# Altium PCB Snippet of H2E2-ARC.PcbDoc
Units mil, origin at the board's own origin, x right, y up, seen from the top; angles counter-clockwise.
Board outline not stored, 4 copper layers (Top Layer, Internal Plane 1, Mid-Layer 1, Bottom Layer), stack 18.2 mil thick; 13 components, 0 nets, 32 pads, 0 vias.
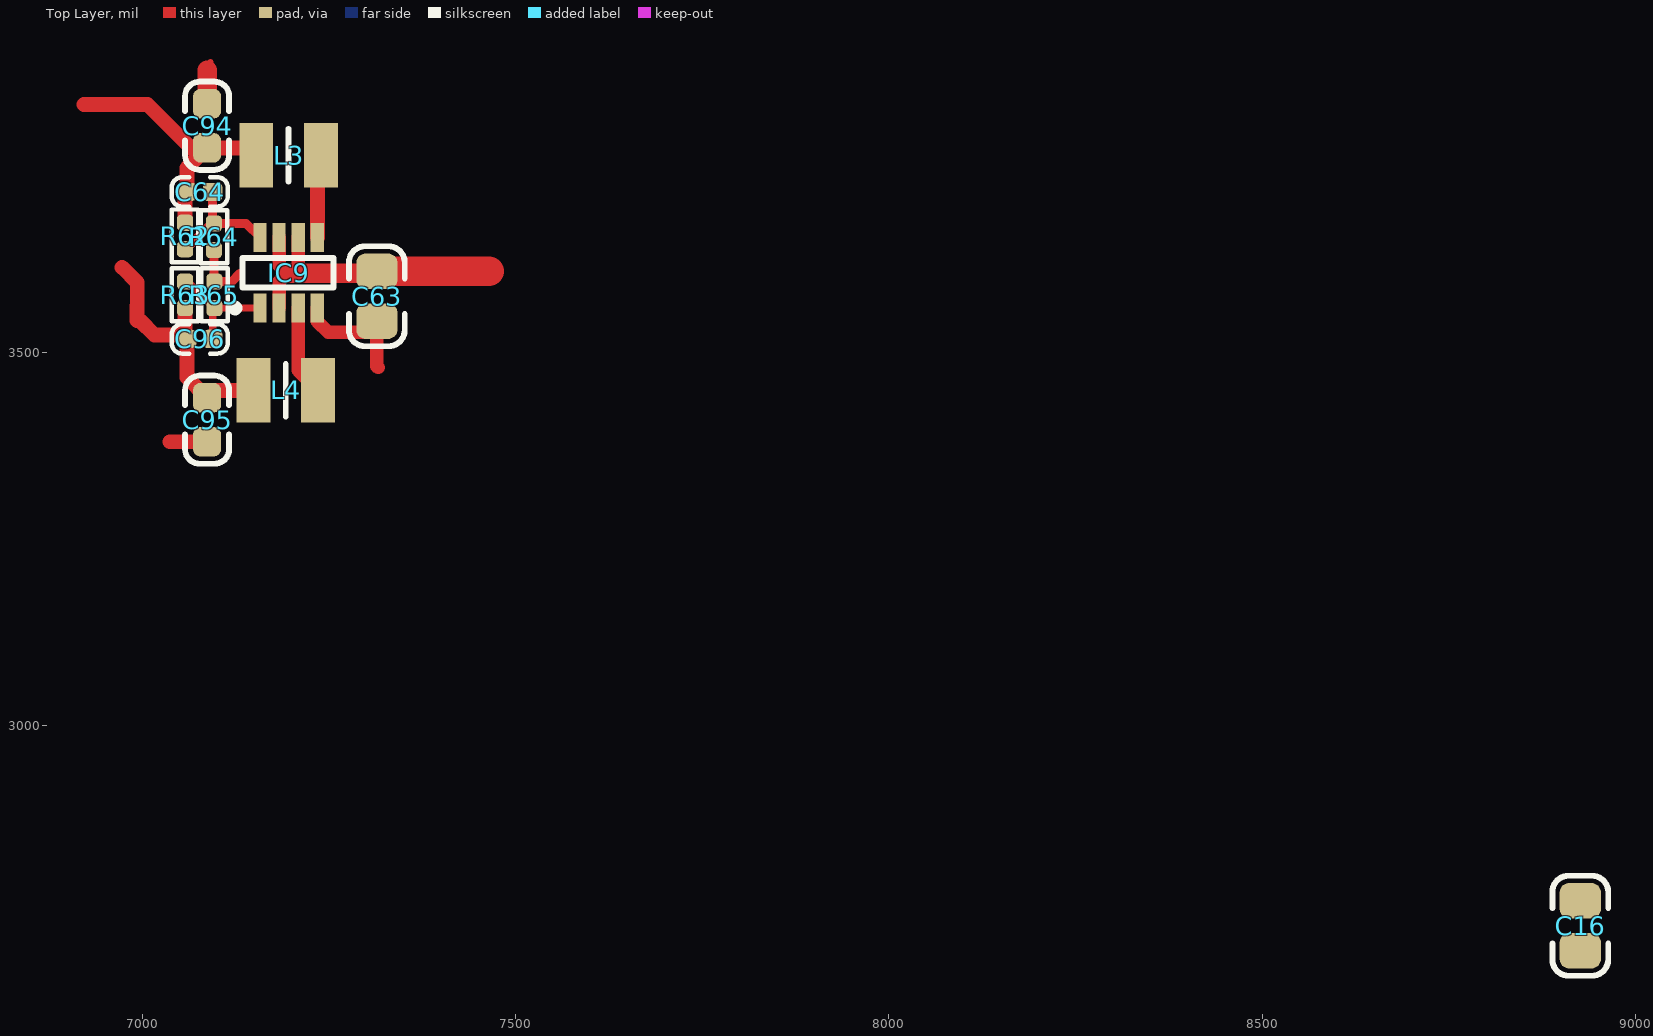
[diagram p0: Top Layer view]
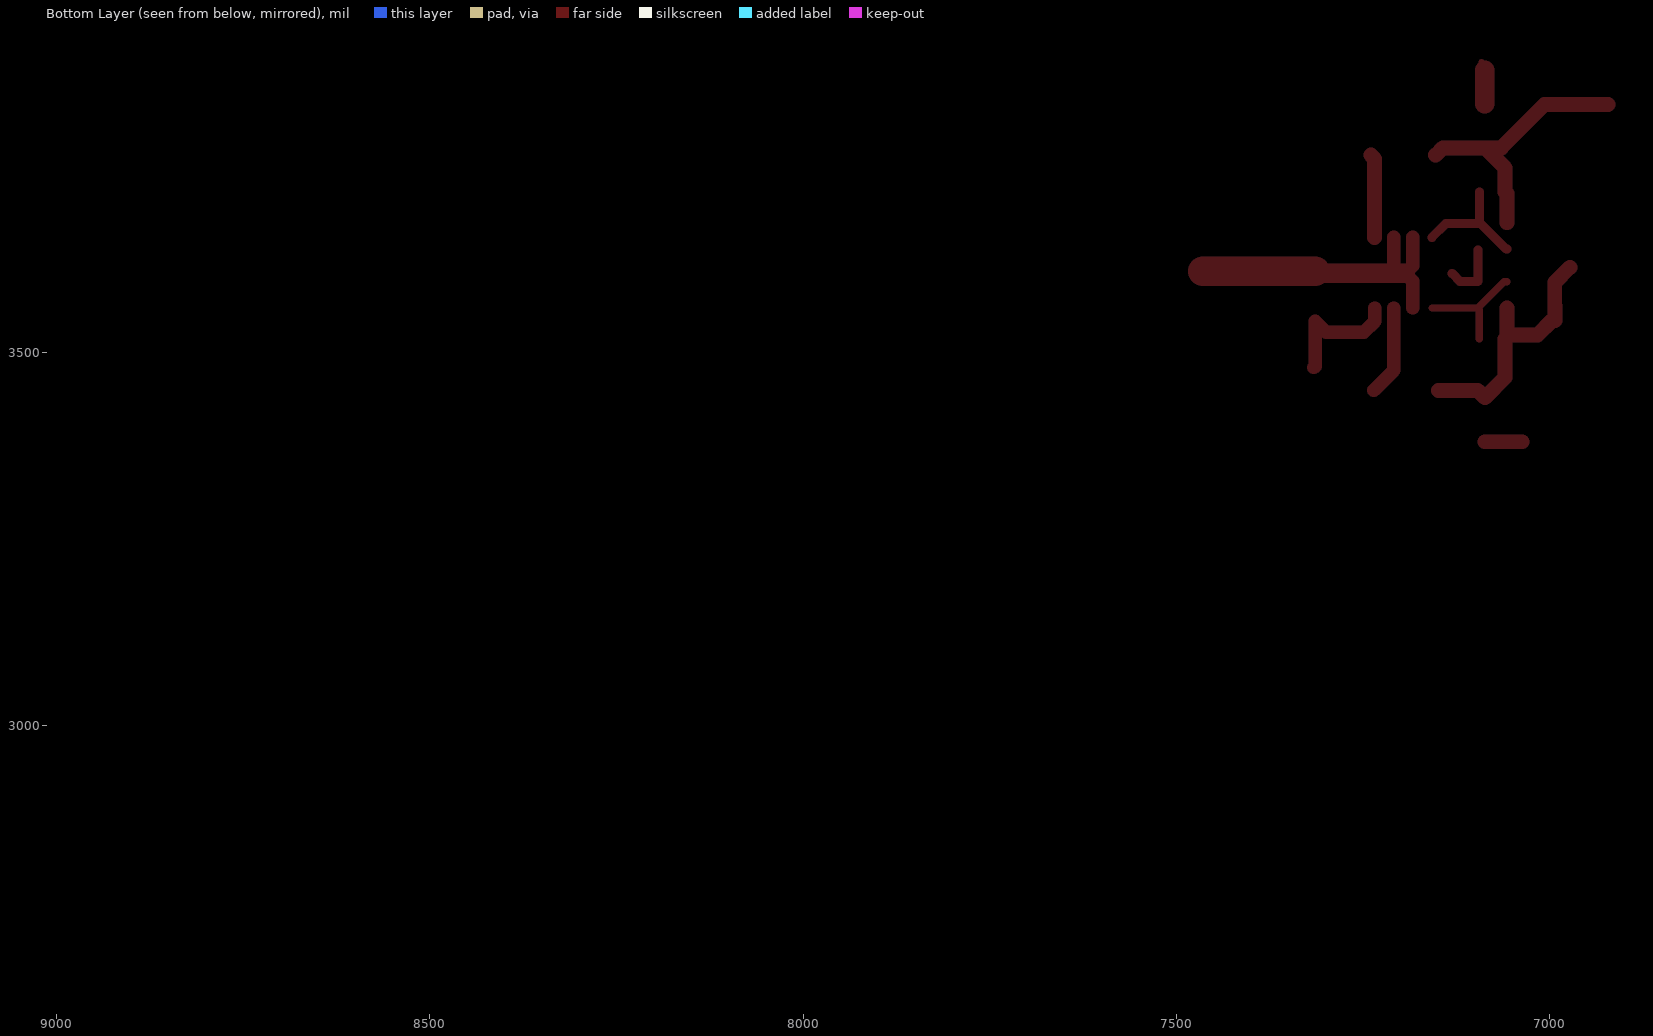
[diagram p1: Bottom Layer view, seen from below]
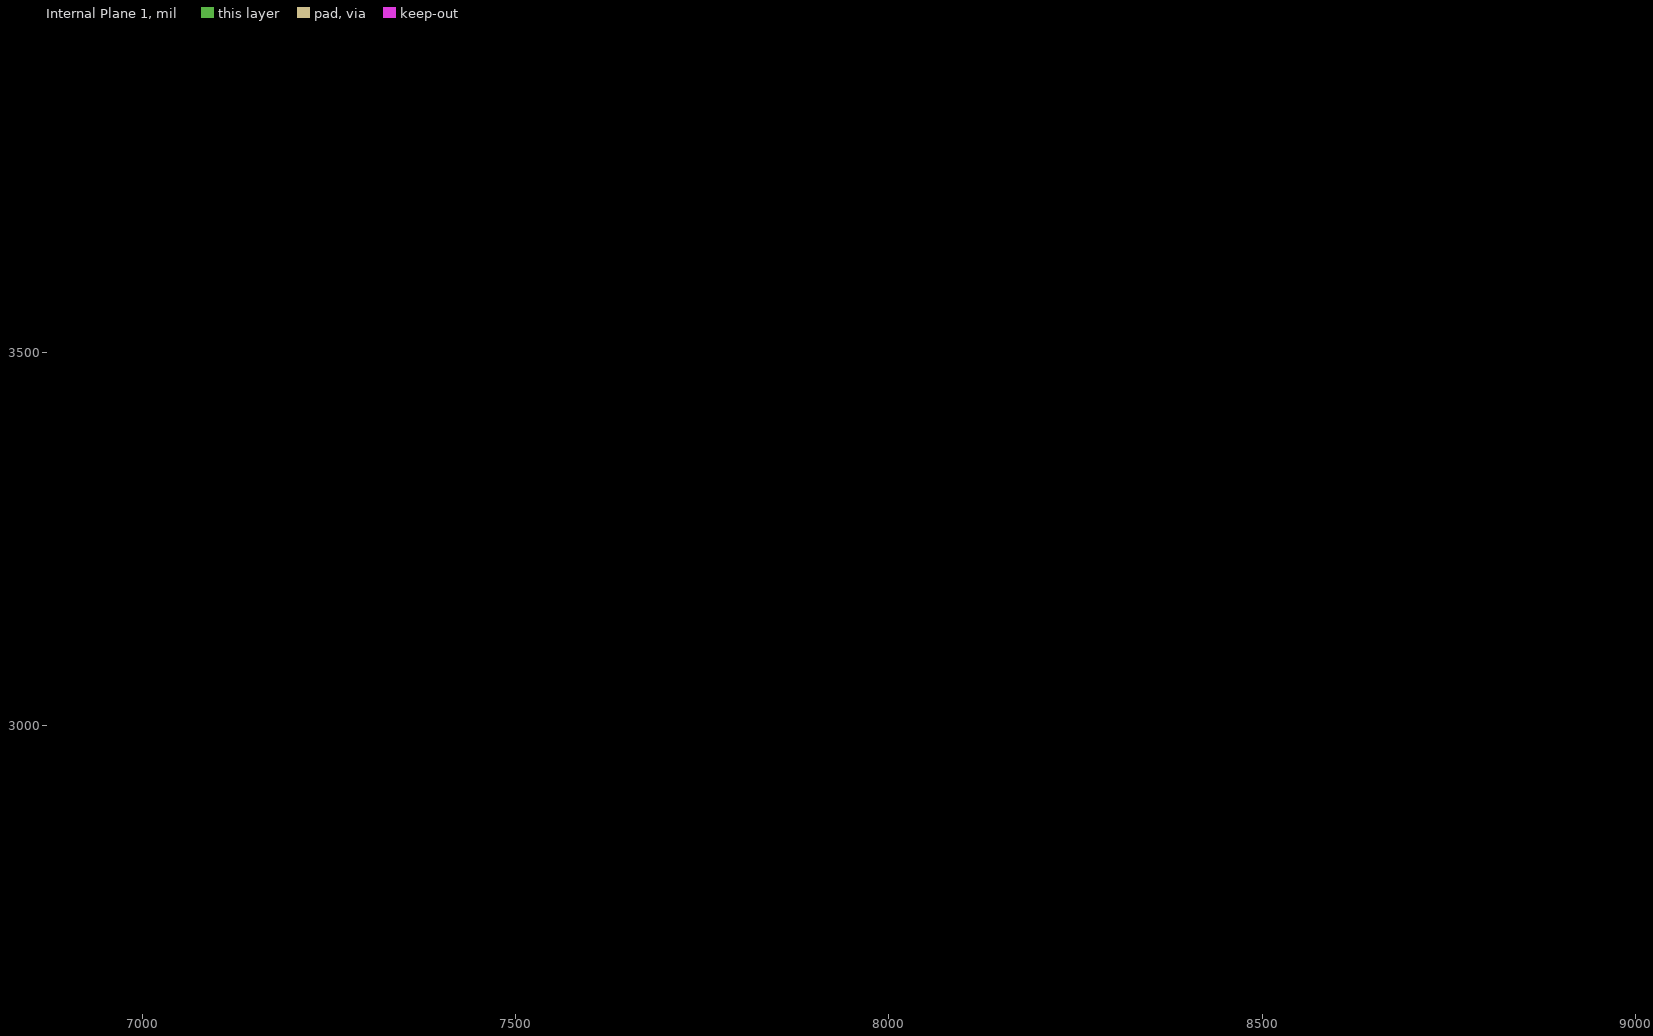
[diagram p2: Internal Plane 1, clearances drawn from the general rule]

## Layer stack, top to bottom
Top Solder: solder mask 0.4, Solder Resist, Dk 3.5
Top Layer: signal copper 1.4
Dielectric 1: dielectric 12.6, FR-4, Dk 4.8
Internal Plane 1: plane copper 1.4
Mid-Layer 1: signal copper 1.4
Bottom Layer: signal copper 1.4
Bottom Solder: solder mask 0.4, Solder Resist, Dk 3.5

## Components (designator, comment, footprint, x,y, rotation, side; value= is the part's Value field where it differs from the comment)
C16 "22uF" C_0805 8926.19,2731.83 r270 top
C63 "10uF" C_0805 7314.31,3574.97 r270 top
C64 "22pF" C_0402 7077.08,3714.73 r0 top
C94 "22uF" C_0603 7086.92,3803.31 r90 top
C95 "22uF" C_0603 7086.92,3409.61 r270 top
C96 "22pF" C_0402 7077.08,3517.88 r180 top
IC9 "SY8029AIC" SOT23-8 7196.2,3606.46 r90 top
L3 "2.2uH/1.5A" INDC2520X100N 7196.2,3763.94 r180 top
L4 "2.2uH/1.5A" INDC2520X100N 7192.26,3448.98 r0 top
R62 "22kΩ" R_0402 7057.39,3655.68 r90 top
R63 "100kΩ" R_0402 7057.39,3576.94 r90 top
R64 "22kΩ" R_0402 7096.07,3654.63 r90 top
R65 "22kΩ" R_0402 7096.76,3576.94 r90 top

## Footprints (in the part's own frame and the unit in brackets; to place one, negate y for a bottom-side part, rotate by r counter-clockwise, add the part's x,y. Pads: shape width x height; smd on the part's side, far side on the other; paste and mask are expansions set on the pad)
C_0402 [mm] "Chip Capacitor, 2-Leads, Body 1.00x0.50mm, IPC Medium Density"
  rrect50% 0.66x0.62 smd: 1(-0.44,0) 2(0.44,0)
  silkscreen extent -0.95,-0.5 0.95,0.5, body extent -0.52,-0.27 0.53,0.28, height 0.55
C_0603 [mm] "Chip Capacitor, 2-Leads, Body 1.60x0.80mm, IPC Medium Density"
  rrect50% 1x0.95 smd: 1(-0.75,0) 2(0.75,0)
  silkscreen extent -1.5,-0.75 1.5,0.75, body extent -0.8,-0.4 0.8,0.4, height 0.87
C_0805 [mm] "Chip Capacitor, 2-Leads, Body 2.00x1.25mm, IPC Medium Density"
  rrect50% 1.2x1.4 smd: 1(-0.85,0) 2(0.85,0)
  silkscreen extent -1.7,-0.95 1.7,0.95, body extent -1,-0.62 1,0.63, height 0.88
INDC2520X100N [mm]
  rect 1.15x2.2 smd: 1(-1.1,0) 2(1.1,0)
  silkscreen extent 0,-0.9 0,0.9, body extent -1.25,-1 1.25,1, height 1
R_0402 [mm] "Chip Resistor, 2-Leads, Body 1.00x0.50mm, IPC Medium Density"
  rrect50% 0.55x0.55 smd: 1(-0.45,0) 2(0.45,0)
  silkscreen extent -0.9,-0.45 0.9,0.45, body extent -0.5,-0.27 0.5,0.28, height 0.4
SOT23-8 [mm]
  rect 1x0.45 smd: 1(-1.2,0.975) 2(-1.2,0.325) 3(-1.2,-0.325) 4(-1.2,-0.975) 5(1.2,-0.975) 6(1.2,-0.325) 7(1.2,0.325) 8(1.2,0.975)
  silkscreen extent -1.32,-1.52 0.5,1.95, body extent -1.4,-1.51 1.4,1.49, height 1.15

## Part data
C16 C63 C64 C94 C95 C96: library part Cap_Chip, "贴片电容"
IC9: "DC-DC降压芯片", Manufacturer_Name="Silergy Corp", Manufacturer_Part_Number=SY8029AIC
L3 L4: library part MLP2520K1R0MT0S1, "Inductor", LCSC=C383383, Manufacturer_Name=TDK, Manufacturer_Part_Number=MLP2520K1R0MT0S1
R62 R63 R64 R65: library part Res_Chip, "贴片电阻"

## Nets (pads, with @x,y where several pads share a name; then routed paths per layer and width w, separated by ;. In a path a pad name is that pad's centre, name@x,y a point inside that pad or via, vN(x,y) a via of type N, cw(c..) or ccw(c..) an arc to the next point about the centre after c; other vN are vias at no path point)
pads on no net: C16.1 C16.2 C63.1 C63.2 C64.1 C64.2 C94.1 C94.2 C95.1 C95.2 C96.1 C96.2 IC9.1 IC9.2 IC9.3 IC9.4 IC9.5 IC9.6 IC9.7 IC9.8 L3.1 L3.2 L4.1 L4.2 R62.1 R62.2 R63.1 R63.2 R64.1 R64.2 R65.1 R65.2
copper on no net: | length 2067.7
  Top Layer w8: 7083.67,3881.1 7091.55,3888.98
  Top Layer w10: 7036.43,3381.1 7037.45,3380.08 ; 7057.39,3594.65 7061.33,3594.65 7096.76,3559.22 ; 7094.4,3517.88 7094.4,3556.86 7096.76,3559.22 ; 7157.81,3559.22 7096.76,3559.22
  Top Layer w12: 7057.39,3637.96 7058.35,3637.96 7094.4,3674.02 ; 7083.67,3881.1 7086.92,3877.86 ; 7094.4,3714.73 7094.4,3674.02 ; 7096.07,3636.91 7096.07,3595.34 7096.76,3594.65 7120.06,3594.65 7130.92,3605.51 ; 7157.81,3653.71 7139.18,3672.34 7096.07,3672.34 7094.4,3674.02
  Top Layer w18: 7183.4,3559.22 7183.4,3595 7193.91,3605.51 7183.4,3616.02 7183.4,3653.71 ; 7208.99,3559.22 7208.99,3475.56 7235.57,3448.98 ; 7208.99,3606.18 7208.99,3653.71 ; 7234.58,3559.22 7234.58,3541.22 7249.03,3526.77 7299.58,3526.77 7314.31,3541.5 7314.31,3481.18 7315.96,3479.53
  Top Layer w20: 6921.8,3831.94 7006.86,3831.94 7065.01,3773.79 7086.92,3773.79 ; 6973.14,3613.68 6993.38,3593.45 6993.38,3562.5 6993.12,3562.24 6993.12,3542.52 6997.06,3542.52 7016.75,3522.83 7054.8,3522.83 7057.39,3520.24 ; 7037.45,3380.08 7086.92,3380.08 ; 7057.39,3559.22 7057.39,3520.24 ; 7057.39,3673.39 7057.39,3712.37 7059.76,3714.73 7059.76,3746.62 7086.92,3773.79 ; 7148.95,3448.98 7096.76,3448.98 7086.92,3439.14 7059.76,3466.31 7059.76,3517.88 7057.39,3520.24 ; 7152.89,3763.94 7143.05,3773.79 7086.92,3773.79 ; 7208.99,3606.18 7209.66,3605.51 ; 7234.58,3653.71 7234.58,3759.02 7239.51,3763.94 ; 7311.39,3605.51 7314.31,3608.43
  Top Layer w26: 7086.92,3832.84 7086.92,3877.86 ; 7193.91,3605.51 7209.66,3605.51 7311.39,3605.51
  Top Layer w40: 7314.31,3608.43 7464.55,3608.43